# Altium PCB SM1_System..PcbDoc
Units mm, origin at the board's own origin, x right, y up, seen from the top; angles counter-clockwise.
Board outline 45.34 x 33.02 mm, 4 copper layers (Top Layer, Layer 1 (GND), Layer 2 (PWR), Bottom Layer), stack 1.716 mm thick; 56 components, 41 nets, 252 pads, 60 vias.
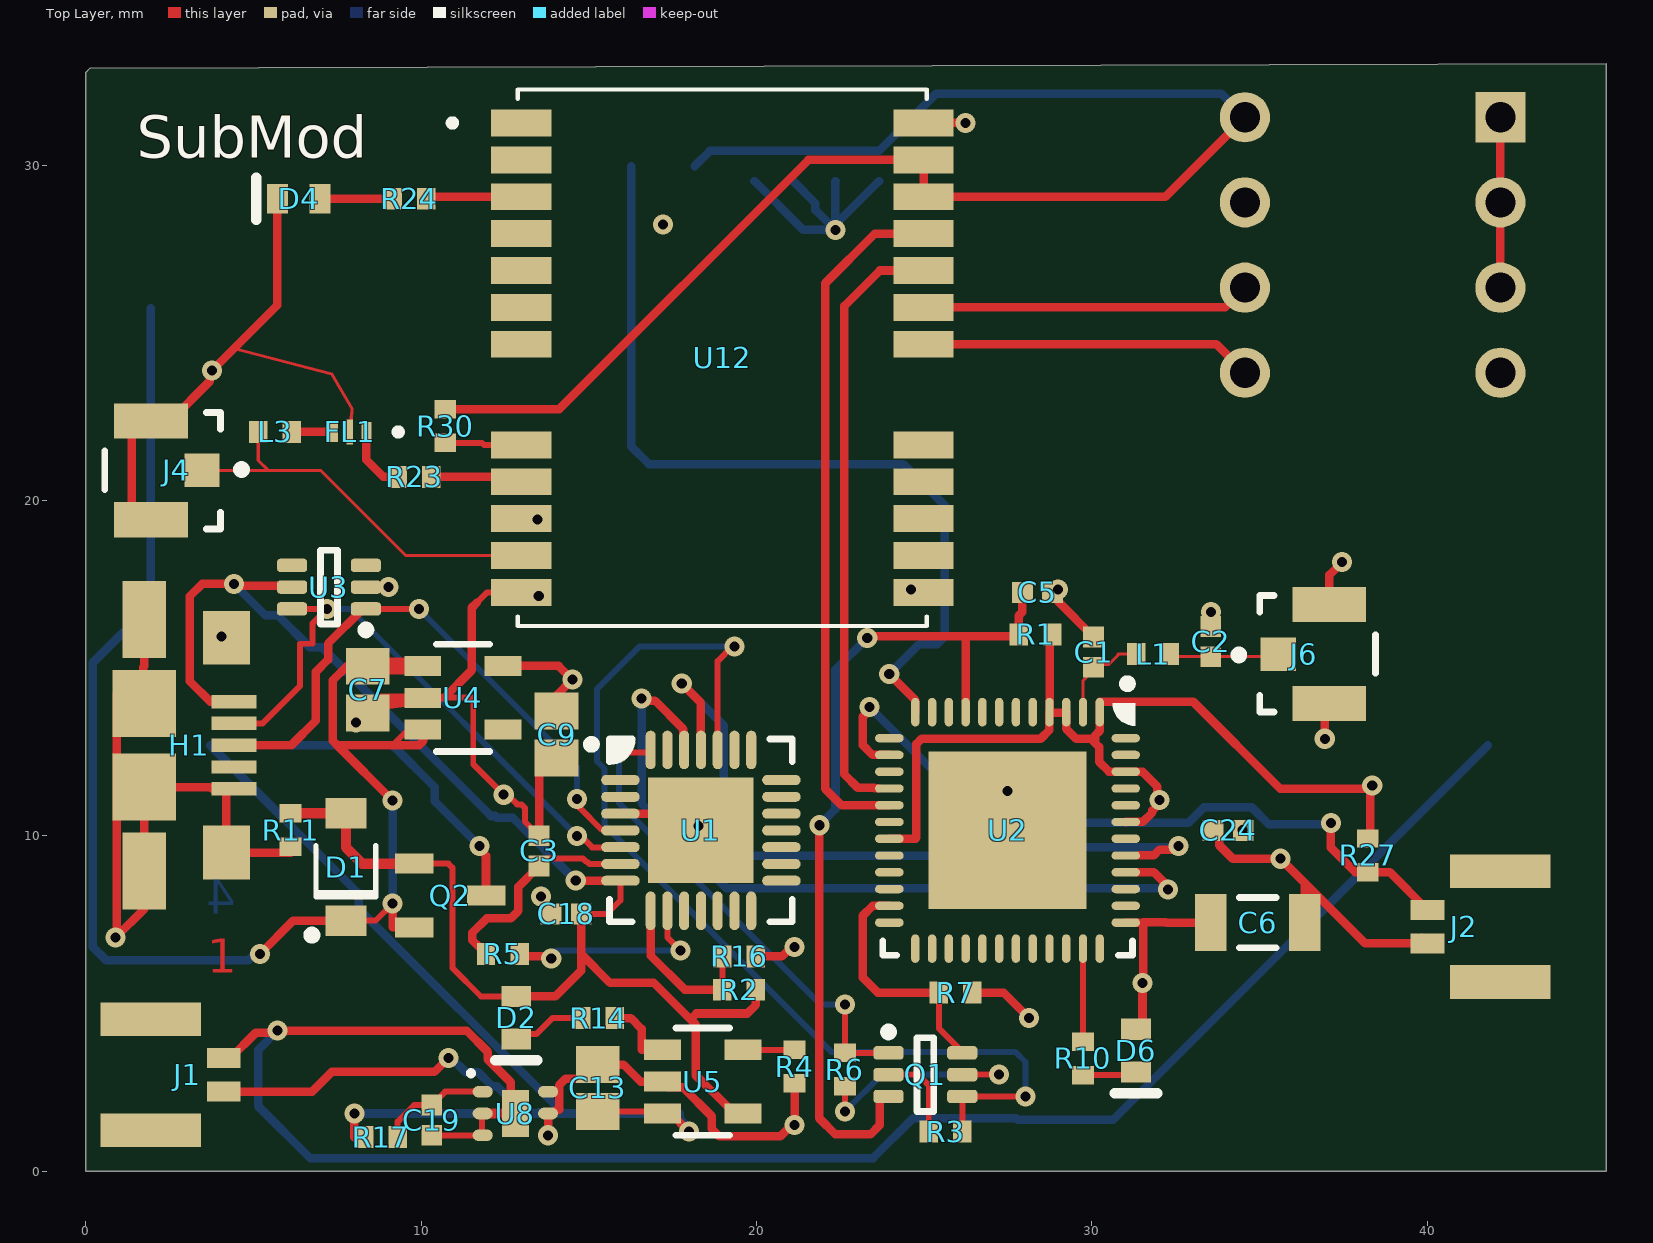
[diagram p0: Top Layer view]
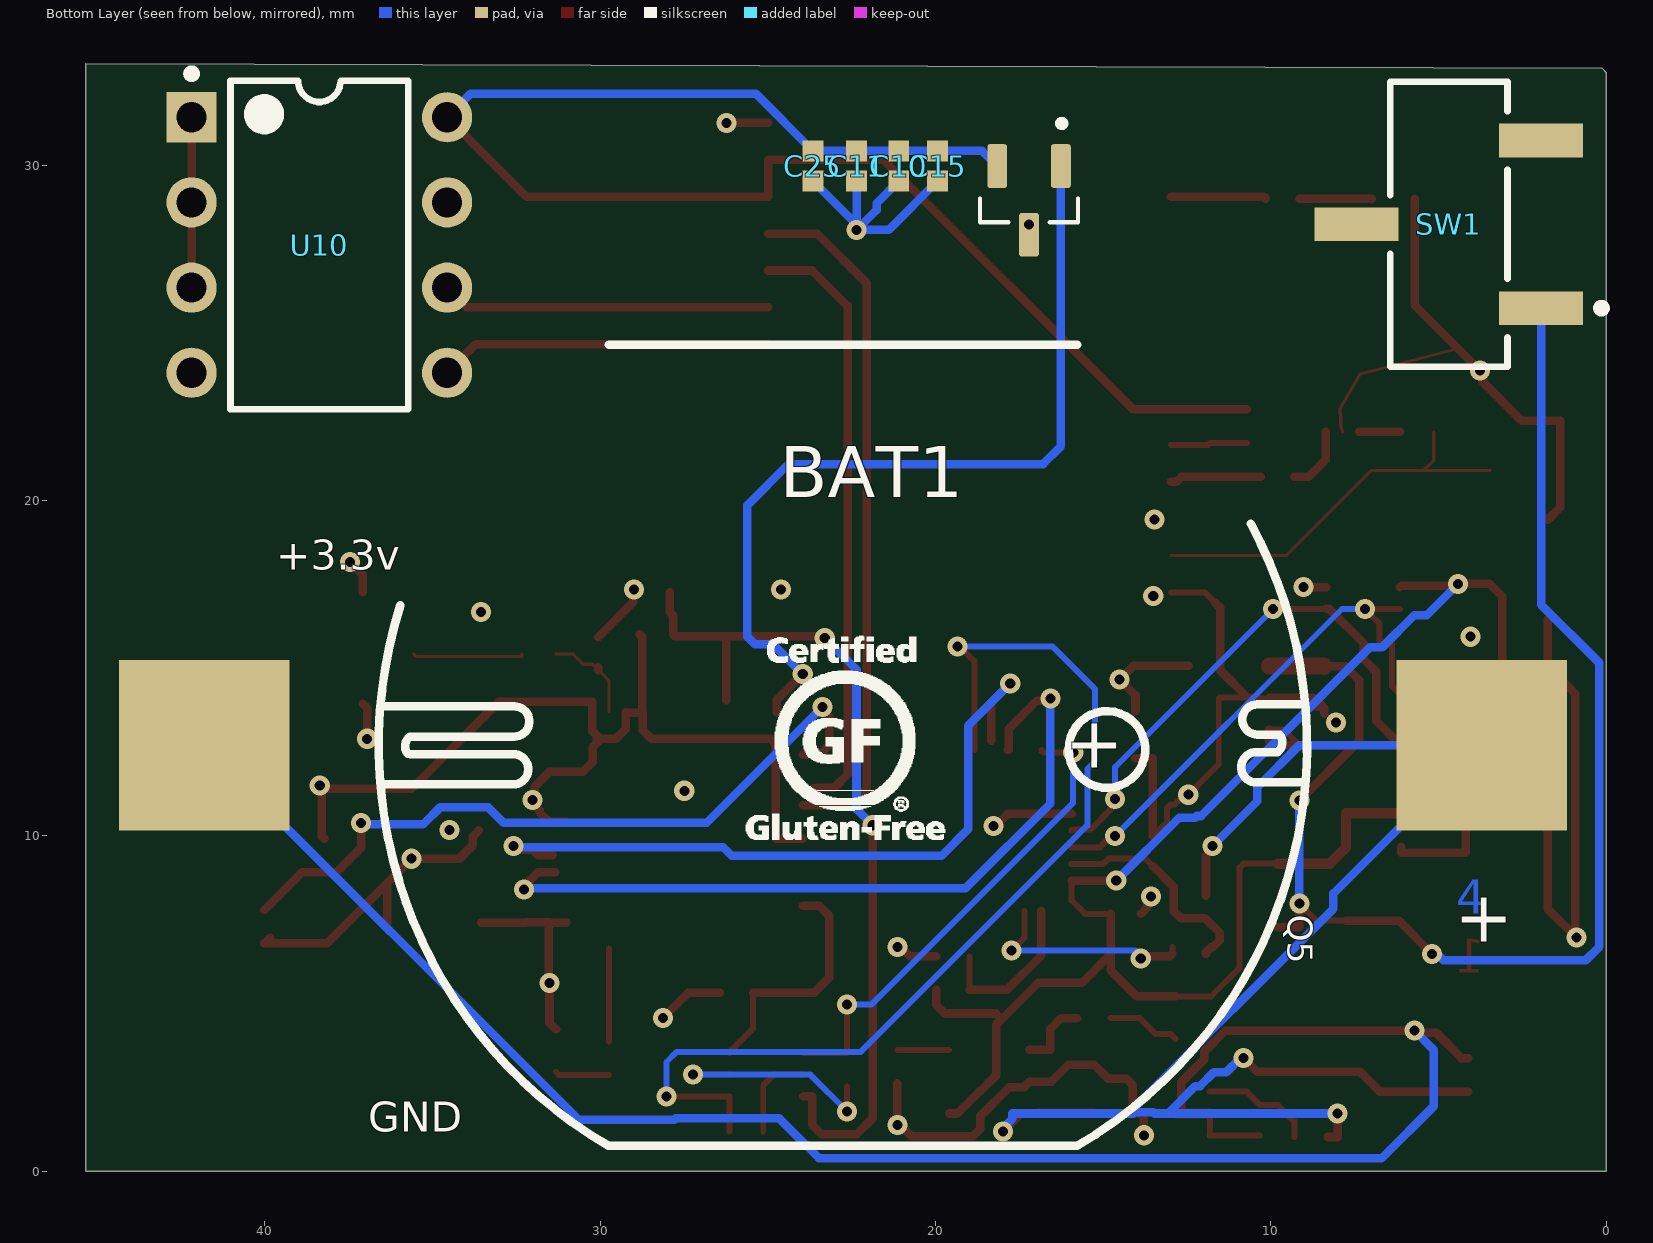
[diagram p1: Bottom Layer view, seen from below]
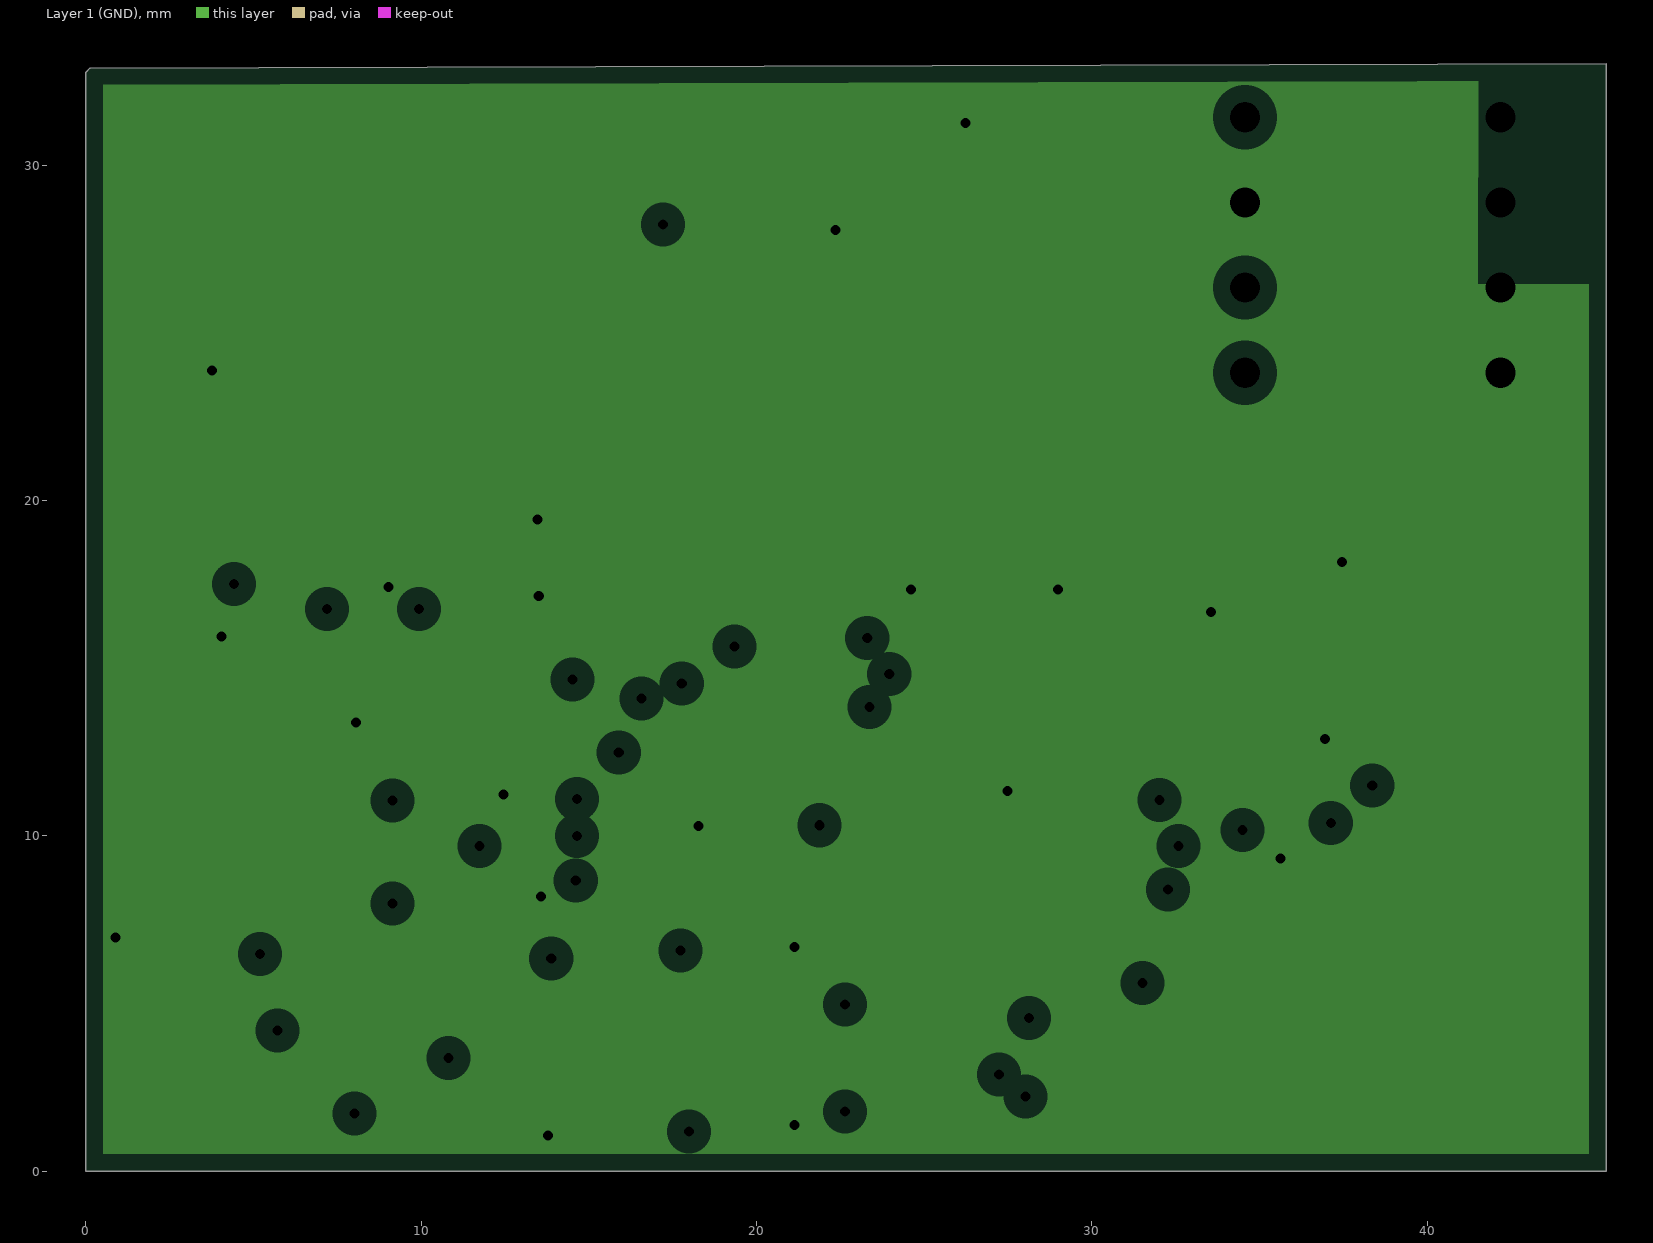
[diagram p2: Layer 1 (GND), clearances drawn from the general rule]
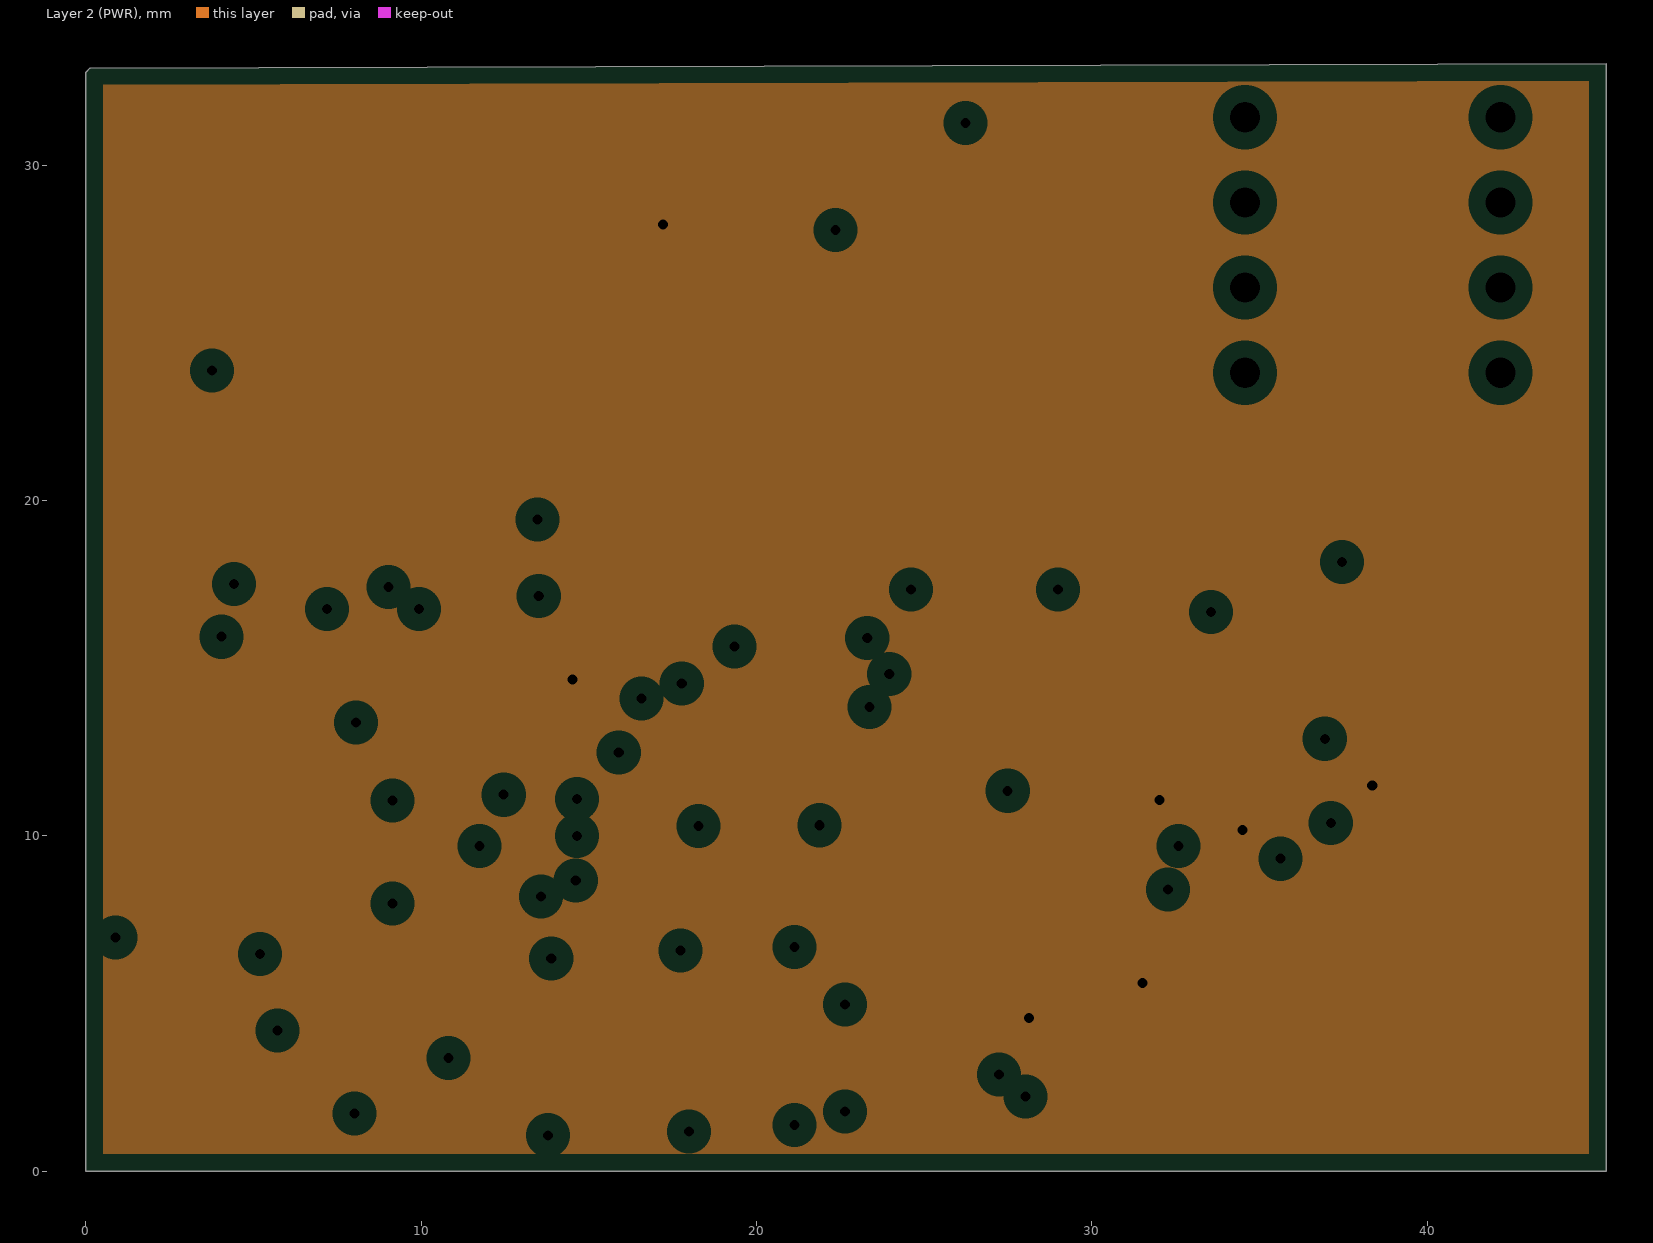
[diagram p3: Layer 2 (PWR), clearances drawn from the general rule]
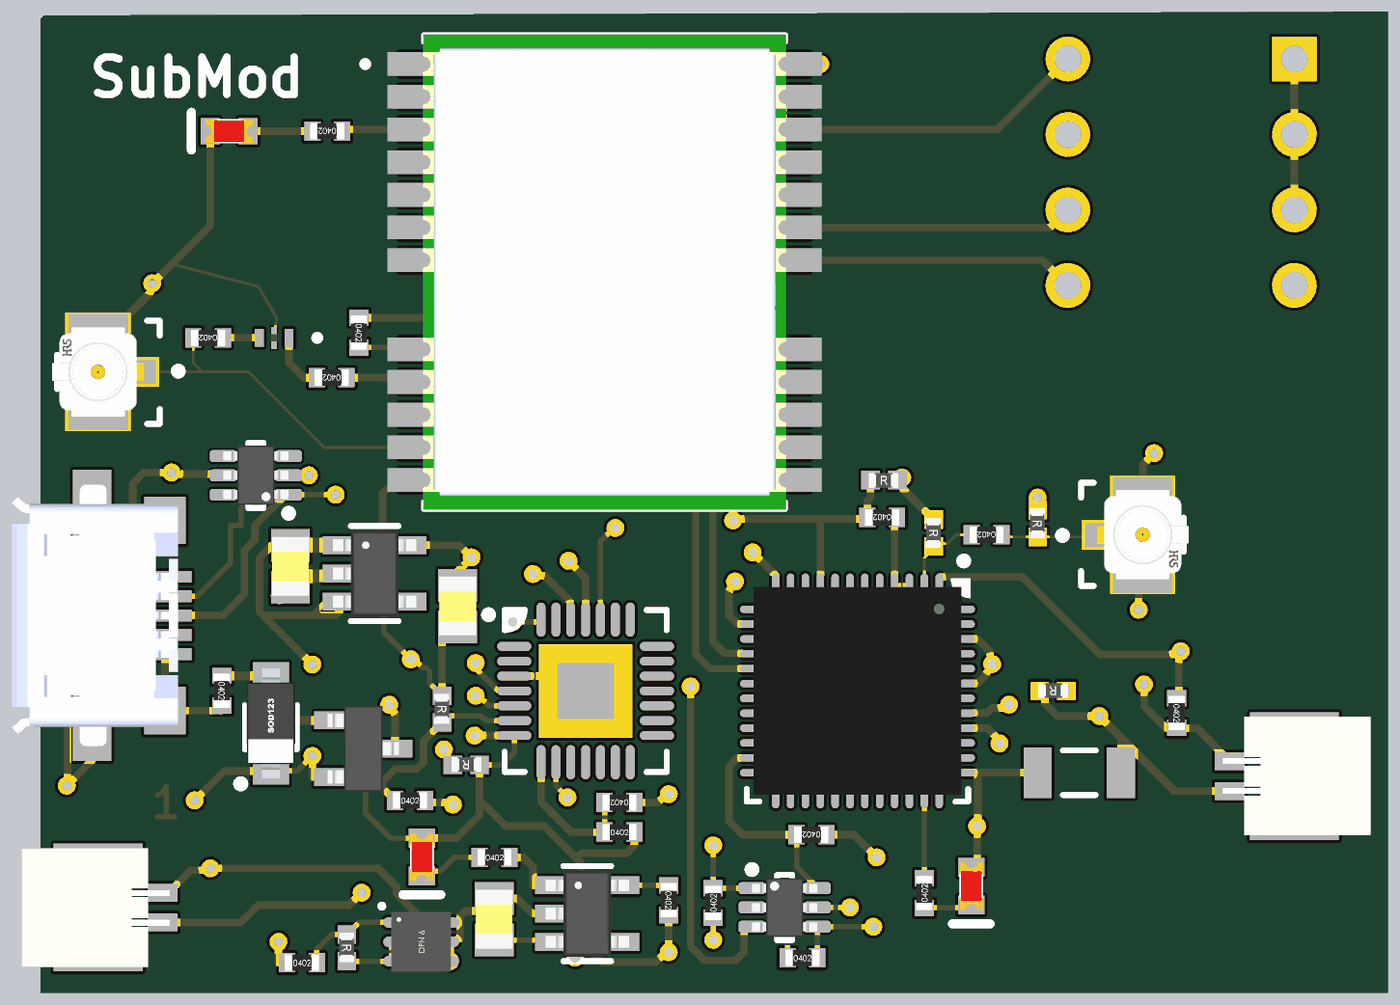
[diagram p4: 3D render of the assembled board from above, using the file's embedded part models]
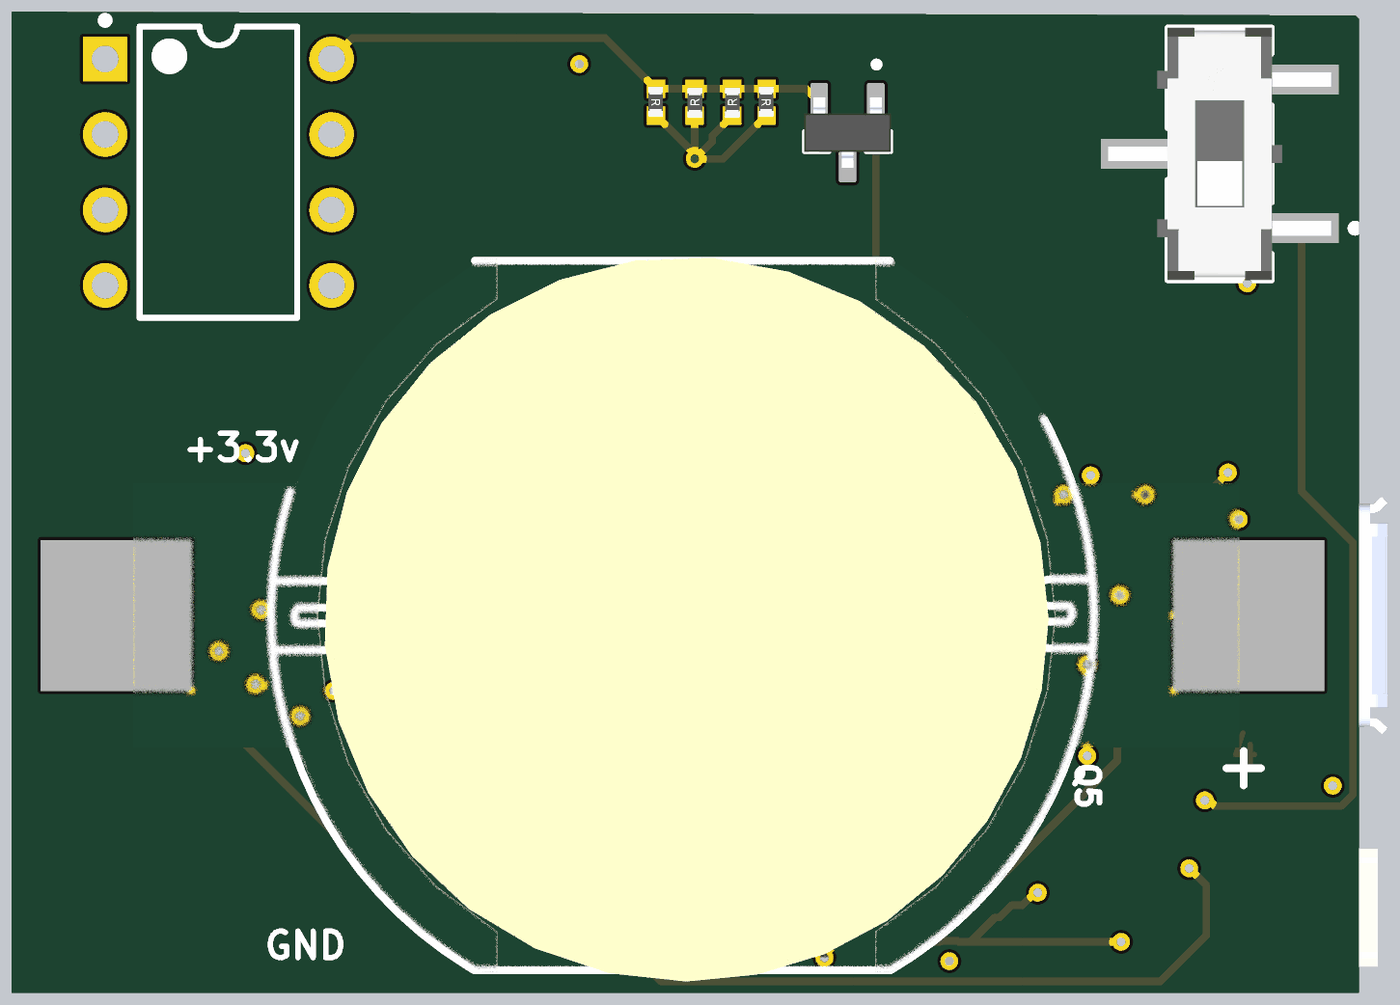
[diagram p5: 3D render of the assembled board from below, using the file's embedded part models]

## Layer stack, top to bottom
Top Solder: solder mask 0.0102, Solder Resist, Dk 3.5
Top Layer: signal copper 0.0356
Dielectric 2: prepreg 0.0711, PP-006, Dk 4.1
Layer 1 (GND): plane copper 0.035, net GND
Dielectric 1: dielectric 1.4326, FR-4, Dk 4.8
Layer 2 (PWR): plane copper 0.035, net +3.3V
Dielectric 3: prepreg 0.0711, PP-006, Dk 4.1
Bottom Layer: signal copper 0.0356
Bottom Solder: solder mask 0.0102, Solder Resist, Dk 3.5

## Board outline
0.127,32.893 0,32.766 0,0 45.339,0 45.339,33.02

## Design rules (kind name [scope] priority, off if disabled: settings)
Clearance Clearance_H1 [All vs InComponent('H1')] p1: gap=0.241 ignorepadtopadclearanceinfootprint=FALSE
Clearance Clearance_U3 [All vs InComponent('U3')] p2: gap=0.241 ignorepadtopadclearanceinfootprint=FALSE
Clearance Clearance_Q1 [All vs InComponent('Q1')] p3: gap=0.241 ignorepadtopadclearanceinfootprint=FALSE
Clearance Clearance_X1 [All vs InComponent('X1')] p4: gap=0.216 ignorepadtopadclearanceinfootprint=FALSE
Clearance Clearance_U2 [All vs InComponent('U2')] p5: gap=0.241 ignorepadtopadclearanceinfootprint=FALSE
Clearance Clearance_U1 [All vs InComponent('U1')] p6: gap=0.198 ignorepadtopadclearanceinfootprint=FALSE
Clearance Clearance_U6 [All vs InComponent('U6')] p7: gap=0.191 ignorepadtopadclearanceinfootprint=FALSE
Clearance [All] p8: gap=0.254 ignorepadtopadclearanceinfootprint=FALSE except(0: Arc-Hole Track-Hole SMDPad-Hole THPad-Hole Via-Hole Fill-Hole Poly-Hole Region-Hole Text-Hole)
MaxMinImpedance [InNet('NetC1_2')] p1: minimum=50.00 maximum=50.00
MinimumSolderMaskSliver MinimumSolderMaskSliver_X1 [All vs InComponent('X1')] p1: minsoldermaskwidth=0.015
MinimumSolderMaskSliver [All] p2: minsoldermaskwidth=0.025
PlaneClearance [All] p1: clearance=0.508
PlaneConnect [All] p1: pad.planeconnectstyle=Relief pad.reliefexpansion=0.508 pad.reliefentries=4 pad.reliefconductorwidth=0.254 pad.reliefairgap=0.254 via.planeconnectstyle=Direct via.reliefexpansion=0.508 via.reliefentries=4 via.reliefconductorwidth=0.254 via.reliefairgap=0.254
PolygonConnect [All] p1: connectstyle=Relief reliefconductorwidth=0.254 reliefentries=4 polygonreliefangle="90 Angle" airgapwidth=0.254
RoutingVias [All] p1: holewidth=0.3 width=0.6 viastyle="Through Hole" minholewidth=0.3 minwidth=0.6 maxholewidth=0.3 maxwidth=0.6
SilkToSilkClearance [All] p1: silktosilkclearance=0.127
SilkToSolderMaskClearance [IsPad] p1: minsilkscreentomaskgap=0.127 clearancetoexposedcopper=TRUE
SolderMaskExpansion [All] p1: expansion=0.102 istentingtop=FALSE
Width [InNet('NetJ4_1')] p1: maxlimit=1.016 minlimit=0.093 preferedwidth=0.093
25 further rules are at their usual default settings.

## Classes and differential pairs
component class SM2_GPS_Module: C10 C11 C15 C25 D4 FL1 J4 L3 R23 R24 R30 U10 U12
component class SM1_System: BAT1 C1 C2 C3 C5 C6 C7 C9 C13 C18 C19 C24 D1 D2 D6 H1 J1 J2 J6 L1 Q1 Q2 Q5 R1 R2 R3 R4 R5 R6 R7 R10 R11 R14 R16 R17 R27 SW1 U1 U2 U3 U4 U5 U8

## Components (designator, comment, footprint, x,y, rotation, side; value= is the part's Value field where it differs from the comment)
BAT1 "BATTERY-HOLDER (2450)" BU2450SM-JJ-GTR 22.763,12.7 r0 bottom locked value="Coin Cell Holder"
C1 "" CAPC1005X56N#1 30.054,15.476 r270 top
C2 "" CAPC1005X56N#1 33.549,15.791 r270 top
C3 "4.7uF" CAPC1005X56N#2 13.517,9.547 r270 top
C5 "0.1uF" CAPC1005X56N#2 28.379,17.257 r0 top
C6 "100uF" CAPC3216X160L 34.949,7.41 r0 top
C7 "10uF" CAPC2012X140N 8.412,14.355 r270 top
C9 "10uF" CAPC2012X140N 14.036,13.016 r270 top
C10 "10uF" CAPC1005X56N#1 21.097,29.972 r90 bottom
C11 "0.1uF" CAPC1005X56N#1 22.356,29.972 r90 bottom
C13 "10uF" CAPC2012X140N 15.27,2.478 r90 top
C15 "100nF" CAPC1005X56N#1 19.939,29.972 r270 bottom
C18 "1uF" CAPC1005X56N#2 14.323,7.671 r180 top
C19 "0.1uF" CAPC1005X56N#2 10.317,1.517 r270 top
C24 "0.1uF" CAPC1005X56N#1 34.066,10.16 r180 top
C25 "0.1uF" CAPC1005X56N#1 23.654,29.972 r270 bottom
D1 "MBR0520-TP" SOD123 7.756,9.068 r90 top value=MBR0520
D2 "LED_0603" LED1608X55N-RED 12.836,4.572 r90 top value=Red
D4 "LED_0603" LED1608X55N-RED 6.35,28.999 r0 top value=Red
D6 "LED_0603" LED1608X55N-RED 31.316,3.591 r90 top value=Red
FL1 "YFF15SC1H470MT000N" FIL_YFF15SC1H470MT000N 7.866,22.042 r180 top
H1 "Micro USB" 1981584-1 3.078,12.7 r270 top locked
J1 "CON2" JST_Micro_2PIN 4.116,2.871 r270 top
J2 "CON2" JST_Micro_2PIN 40.011,7.288 r90 top
J4 "U.FL-R-SMT-1(80)" FP-U_FL-R-SMT-1_80-MFG 1.941,20.897 r90 top
J6 "U.FL-R-SMT-1(80)" FP-U_FL-R-SMT-1_80-MFG 37.084,15.418 r270 top
L1 "Inductor" RESC1005X40L 31.83,15.418 r180 top value=1.8nH
L3 "Inductor" RESC1005X40L 5.643,22.042 r180 top value=27nH
Q1 "BC847S" SOT65P210X110-6N 25.038,2.85 r0 top value=2NPN
Q2 "FDN340P" SOT95P240X110-3N 10.863,8.217 r0 top locked value="Mosfet P-H"
Q5 "IRLML2502" SOT95P237X112-3N 17.211,28.947 r270 bottom
R1 "10K" RESC1005X40L 28.321,16.002 r180 top
R2 "22.1K" RESC1005X40L 19.481,5.41 r0 top
R3 "10K" RESC1005X40L 25.638,1.178 r0 top
R4 "43K" RESC1005X40L 21.137,3.117 r270 top
R5 "4.7K" RESC1005X40L 12.434,6.477 r0 top
R6 "10K" RESC1005X40L 22.636,3.025 r90 top
R7 "10K" RESC1005X40L 25.937,5.324 r180 top
R10 "1K" RESC1005X40L 29.737,3.36 r90 top
R11 "100K" RESC1005X40L 6.105,10.168 r270 top
R14 "2K" RESC1005X40L 15.278,4.561 r0 top
R16 "47.5K" RESC1005X40L 19.481,6.401 r180 top
R17 "100R" RESC1005X40L 8.801,1.016 r0 top
R23 "22R" RESC1005X40L 9.801,20.701 r180 top value=10
R24 "1K" RESC1005X40L 9.652,28.999 r180 top
R27 "DNP" RESC1005X40L 38.227,9.418 r270 top
R30 "1K" RESC1005X40L 10.717,22.217 r270 top
SW1 "JS102011SCQN" FP-JS102011SCQN-MFG 4.691,28.234 r90 bottom
U1 "CP2102N" 28-QFN 18.343,10.16 r0 top locked
U2 "ESP32-PICO-D4" QFN48 27.487,10.16 r270 top
U3 "PESD5V0L5UY" SOT65P210X110-6N 7.251,17.439 r180 top value=ESD
U4 "HT7833" SOT95P280X144-5N 11.246,14.113 r0 top value="LDO 3.3V"
U5 "SL4054ST25P" SOT95P280X144-5N 18.397,2.667 r0 top
U8 "XB6566H0" "DFN-6 2x2mm" 12.811,1.717 r0 top value="Battery Protection"
U10 "24AA32A-I/P" PDIP300-P8 38.376,27.617 r180 bottom
U12 "NEO-7M-0" XCVR_NEO-7M-0 18.981,24.257 r0 top

## Footprints (in the part's own frame and the unit in brackets; to place one, negate y for a bottom-side part, rotate by r counter-clockwise, add the part's x,y. Pads: shape width x height; smd on the part's side, far side on the other; paste and mask are expansions set on the pad)
28-QFN [mm] "QFN, 28-Leads, Body 5.00x5.00mm, Pitch 0.50mm, Thermal Pad 3.15x3.15mm, IPC Medium Density"
  oval 1.15x0.3 smd: 1(-2.4,1.5) 2(-2.4,1) 3(-2.4,0.5) 4(-2.4,0) 5(-2.4,-0.5) 6(-2.4,-1) 7(-2.4,-1.5) 15(2.4,-1.5) 16(2.4,-1) 17(2.4,-0.5) 18(2.4,0) 19(2.4,0.5) 20(2.4,1) 21(2.4,1.5)
  oval 0.3x1.15 smd: 8(-1.5,-2.4) 9(-1,-2.4) 10(-0.5,-2.4) 11(0,-2.4) 12(0.5,-2.4) 13(1,-2.4) 14(1.5,-2.4) 22(1.5,2.4) 23(1,2.4) 24(0.5,2.4) 25(0,2.4) 26(-0.5,2.4) 27(-1,2.4) 28(-1.5,2.4)
  rect 3.15x3.15 smd paste-0.635: 29(0,0)
  silkscreen extent -3.39,-2.73 2.73,2.73, body extent -2.58,-2.57 2.57,2.58, height 1
1981584-1 [mm] "CONN RCPT MICRO USB TYPE AB"
  rect 0.4x1.35 smd: 1(-1.3,1.338) 2(-0.65,1.338) 3(0,1.338) 4(0.65,1.338) 5(1.3,1.338)
  rect 2.3x1.3 smd: 6(-3.75,-1.338) 6(3.75,-1.338)
  rect 1.6x1.4 smd: 6(-3.2,1.113) 6(3.2,1.113)
  rect 2x1.9 smd: 6(-1.25,-1.338) 6(1.25,-1.338)
  body extent -4.4,-4.05 4.4,1.55, height 2.75
BU2450SM-JJ-GTR [mm] "HOLDER,BATT,COIN,24.5MM,SMT"
  rect 5.08x5.08 smd: 1(-19.05,0) 2(19.05,0)
  silkscreen extent -13.84,-11.94 13.84,11.95, body extent -21.38,-12.06 21.12,12.32, height 7.38
CAPC1005X56N#1 [mm] "Chip Capacitor, 2-Leads, Body 1.0x0.5mm, IPC Medium Density (0402 ceramic)"
  rect 0.62x0.62 smd paste-0.305: 1(-0.45,0) 2(0.45,0)
  body extent -0.55,-0.3 0.55,0.3, height 0.6
CAPC1005X56N#2 [mm] "Chip Capacitor, 2-Leads, Body 1.0x0.5mm, IPC Medium Density (0402 ceramic)"
  rect 0.62x0.62 smd: 1(-0.45,0) 2(0.45,0)
  body extent -0.55,-0.3 0.55,0.3, height 0.6
CAPC2012X140N [mm] "Chip Capacitor, 2-Leads, Body 2.0x1.3mm, IPC Medium Density (0805 ceramic)"
  rect 1.1x1.3 smd: 1(-0.7,0) 2(0.7,0)
  body extent -1,-0.62 1,0.63, height 1.24
CAPC3216X160L [mm] "Chip Capacitor, 2-Leads, Body 3.2x1.6mm, IPC Least Density(C1206)"
  rect 0.95x1.7 smd: 1(-1.4,0) 2(1.4,0)
  silkscreen extent -0.55,-0.75 0.55,0.75, body extent -1.7,-0.9 1.7,0.9, height 1.9
"DFN-6 2x2mm" [mm] "DFN, 6-Leads, Body 2.00x2.00mm, Pitch 0.65mm, IPC High Density"
  oval 0.6x0.35 smd: 1(-0.975,0.65) 2(-0.975,0) 3(-0.975,-0.65) 4(0.975,-0.65) 5(0.975,0) 6(0.975,0.65)
  rect 0.8x1.4 smd paste-0.15: 7(0,0)
  silkscreen extent -1.37,1.15 -1.27,1.25, body extent -1,-1 1,1, height 0.75
FIL_YFF15SC1H470MT000N [mm]
  rect 0.3x0.6 smd: 1(-0.5,0) 2(0.5,0)
  rect 0.19x0.75 smd paste-1 mask+0: 3(0,0)
  silkscreen extent -1.55,-0.1 -1.35,0.1
FP-JS102011SCQN-MFG [mm]
  rect 1x2.5 smd paste+0 mask+0: 1(-2.5,-2.75) 2(0,2.75) 3(2.5,-2.75)
  silkscreen extent -4.25,-4.67 4.25,1.75, body extent -4.25,-3.75 4.25,3.75, height 5.5
FP-U_FL-R-SMT-1_80-MFG [mm]
  rect 1x1.05 smd paste-1000 mask+0: 1(0,-1.525)
  rect 1.05x2.2 smd paste-1000 mask+0: 2(-1.475,0) 3(1.475,0)
  silkscreen extent -1.75,-2.83 1.72,1.38, body extent -2.1,-2.15 2.1,1.73, height 0.25
JST_Micro_2PIN [mm]
  rect 0.6x1 smd: 1(0.5,0) 2(-0.5,0)
  rect 1x3 smd: ""(-1.65,-2.175) ""(1.65,-2.175)
  body extent -1.99,-4.74 2,0.24, height 2.9
LED1608X55N-RED [mil] "Chip LED RED, 2-Leads, Body 1.6x0.8mm, IPC Medium Density (0603 med)"
  rect 25x35 smd: 1(-25,0) 2(25,0)
  silkscreen extent -50,-25 -50,25, body extent -31,-16 31,16, height 24
PDIP300-P8 [mm] "8-Pin Plastic Dual In-Line Package (PDIP)"
  rect 1.5x1.5 hole 0.9: 1(-3.81,3.81)
  round 1.5 hole 0.9: 2(-3.81,1.27) 3(-3.81,-1.27) 4(-3.81,-3.81) 5(3.81,-3.81) 6(3.81,-1.27) 7(3.81,1.27) 8(3.81,3.81)
  silkscreen extent -3.94,-4.9 2.65,5.23, body extent -3.55,-4.9 3.55,4.9, height 4.32
QFN48 [mm] "QFN, 48-Leads, Body 7x7mm, Pitch 0.5mm, IPC Medium Density"
  oval 0.85x0.25 smd: 1(-3.525,2.75) 2(-3.525,2.25) 3(-3.525,1.75) 4(-3.525,1.25) 5(-3.525,0.75) 6(-3.525,0.25) 7(-3.525,-0.25) 8(-3.525,-0.75) 9(-3.525,-1.25) 10(-3.525,-1.75) 11(-3.525,-2.25) 12(-3.525,-2.75) 25(3.525,-2.75) 26(3.525,-2.25) 27(3.525,-1.75) 28(3.525,-1.25) 29(3.525,-0.75) 30(3.525,-0.25) 31(3.525,0.25) 32(3.525,0.75) 33(3.525,1.25) 34(3.525,1.75) 35(3.525,2.25) 36(3.525,2.75)
  oval 0.25x0.85 smd: 13(-2.75,-3.525) 14(-2.25,-3.525) 15(-1.75,-3.525) 16(-1.25,-3.525) 17(-0.75,-3.525) 18(-0.25,-3.525) 19(0.25,-3.525) 20(0.75,-3.525) 21(1.25,-3.525) 22(1.75,-3.525) 23(2.25,-3.525) 24(2.75,-3.525) 37(2.75,3.525) 38(2.25,3.525) 39(1.75,3.525) 40(1.25,3.525) 41(0.75,3.525) 42(0.25,3.525) 43(-0.25,3.525) 44(-0.75,3.525) 45(-1.25,3.525) 46(-1.75,3.525) 47(-2.25,3.525) 48(-2.75,3.525)
  rect 4.7x4.7 smd paste-0.5: 49(0,0)
  silkscreen extent -4.5,-3.73 3.73,3.81, body extent -3.52,-3.51 3.5,3.51, height 0.78
RESC1005X40L [mm] "Chip Resistor, 2-Leads, Body 1.0x0.5mm, IPC Medium Density (0402)"
  rect 0.55x0.65 smd: 1(-0.5,0) 2(0.5,0)
  body extent -0.57,-0.27 0.58,0.28, height 0.41
SOD123 [mil] "Molded Diode, 2-Leads, Body 2.85x1.8mm, IPC Medium Density (SOD123)"
  rect 36x48 smd: 1(-63,0) 2(63,0)
  silkscreen extent -85,-35 25,45, body extent -73,-31 73,31, height 50
SOT65P210X110-6N [mm] "SC70, 6-Leads, Body 2.4x2.2mm (max), Pitch 0.65mm, IPC Medium Density"
  rrect50% 0.9x0.4 smd mask+0.076: 1(-1.1,0.675) 2(-1.1,0.025) 3(-1.1,-0.625) 4(1.1,-0.625) 5(1.1,0.025) 6(1.1,0.675)
  silkscreen extent -1.22,-1.08 0.25,1.42, body extent -1.1,-0.97 1.1,1.01, height 0.99
SOT95P237X112-3N [mm]
  rrect25% 1.3x0.59 smd: 1(-1.025,0.95) 2(-1.025,-0.95) 3(1.025,0)
  silkscreen extent -2.39,-1.46 0.65,1.46, body extent -1.18,-1.46 1.18,1.46, height 1.12
SOT95P240X110-3N [mm] "SOT23, 3-Leads, Body 3.0x2.5mm (max), Pitch 0.95mm, IPC Medium Density"
  rect 1.15x0.6 smd: 1(-1.075,0.95) 2(-1.075,-0.95) 3(1.075,0)
  body extent -1.2,-1.45 1.2,1.45, height 0.99
SOT95P280X144-5N [mm] "SOT23, 5-Leads, Body 3.1x3.0mm (max), Pitch 0.95mm, IPC Medium Density (RFMD SOT23-5)"
  rect 1.1x0.6 smd: 1(-1.2,0.95) 2(-1.2,0) 3(-1.2,-0.95) 4(1.2,-0.95) 5(1.2,0.95)
  silkscreen extent -0.8,-1.6 0.8,1.6, body extent -1.4,-1.45 1.4,1.45, height 1.45
XCVR_NEO-7M-0 [mm]
  rect 1.8x0.8 smd paste-2: 1(-6,7) 2(-6,5.9) 3(-6,4.8) 4(-6,3.7) 5(-6,2.6) 6(-6,1.5) 7(-6,0.4) 8(-6,-2.6) 9(-6,-3.7) 10(-6,-4.8) 11(-6,-5.9) 12(-6,-7) 13(6,-7) 14(6,-5.9) 15(6,-4.8) 16(6,-3.7) 17(6,-2.6) 18(6,0.4) 19(6,1.5) 20(6,2.6) 21(6,3.7) 22(6,4.8) 23(6,5.9) 24(6,7)
  silkscreen extent -8.15,-8 6.1,8, body extent -6.1,-8 6.1,8, height 2.6

## Part data
BAT1: library part BU2450SM-JJ-GTR, "HOLDER,BATT,COIN,24.5MM,SMT", Manufacturer=MPD, PartNumber=BU2450SM-JJ-GTR, Vendor=LCSC
C1 C2: library part CAP_0402, "DNP"
C3: library part CAP_0603, "CAP CER 4.7uF 16V 0402", Manufacturer=Kyocera, PartNumber=CM05X5R475M16AH, Vendor=LCSC
C5 C10 C11 C15 C19 C24 C25: library part CAP_0402, "CAP CER 0.1uF 16V 0402", Manufacturer=CCTC, PartNumber=TCC0402X5R104M160AT, Vendor=LCSC
C6: library part CAP_1206, "CAP CER 100uF 6.3V 1206", Manufacturer="Taiyo Yuden", PartNumber=JMK316BJ107ML-T, Vendor=LCSC
C7 C9: library part CAP_0805, "CAP 10uF 0805", Manufacturer=Murata, PartNumber=GRM21BB31C106KE15L, Vendor=LCSC
C13: library part CAP_0805, "CAP CER 10uF 16V 0805", Manufacturer=Samsung, PartNumber=CL21A106KOQNNNG, Vendor=LCSC
C18: library part CAP_0603, "CAP CER 1uF 16V 0402", Manufacturer=Murata, PartNumber=GRM155R61C105KA12D, Vendor=LCSC
D1: "DIODE SCHOTTKY 20V 500MA SOD123", Manufacturer=CJ, PartNumber=MBR0520, Vendor=LCSC
D2 D4 D6: "LED RED CLEAR 0603 SMD", Manufacturer=FNO, PartNumber=FC-DA1608HRK-620D, Vendor=LCSC
FL1: Package=None, Availability=Unavailable, MP=YFF15SC1H470MT000N, Price=None
H1: library part 1981584-1, "CONN RCPT MICRO USB TYPE AB", Manufacturer="REG CON", PartNumber=C21377, Vendor=LCSC
J1 J2: library part JST_Micro_CONN_2PIN, "JST MIcro CONN 2POS"
J4 J6: library part CMP-11598-000004-1, "CONN U.FL RCPT STR 50 OHM SMD", Case/Package=SMD/SMT, Dielectric Material=Polymer, Housing Color=Beige, Max Frequency=6GHz, Max Operating Temperature=90°C, Min Operating Temperature=-40°C, Package Quantity=10000, Body Material=Bronze, Body Plating=Silver, Center Contact Plating=Gold, Connector Type=Receptacle, Contact Material=Brass, Fastening Type=SNAP-ON, Impedance=50R, Lead Free="Lead Free", Mating Cycles=30, Mount="Surface Mount", Number of Ports=1, Packaging="Tape and Reel", RoHS Compliant=Yes, Series=U.FL, Termination=Solder
L1 L3: "Inductor 1.8nH 0402", Manufacturer=GFBE, PartNumber=BKW0603UC1N8KGT, Vendor=LCSC
Q1: "TRANS 2NPN 44V 0.1A SC-70-6", Manufacturer=Changjiang, PartNumber=BC847S, Vendor=LCSC
Q2: "MOSFET P-CH 20V 2A SOT-23", Manufacturer="On Semi", PartNumber=FDN340P, Vendor=LCSC
Q5: "N-Channel 20 V 4.2A (Ta) 1.25W (Ta) Surface Mount Micro3Ã¢â€žÂ¢ /SOT-23", Package="SOT-23-3 International Rectifier", Availability="Not in stock", Check_prices=https://www.snapeda.com/parts/IRLML2502/Infineon+Technologies/view-part/?ref=eda, MF="Infineon Technologies", MP=IRLML2502, Price=None, SnapEDA_Link=https://www.snapeda.com/parts/IRLML2502/Infineon+Technologies/view-part/?ref=snap
R1 R3 R6 R7 R27: library part RES_0402, "RES SMD 10K OHM 0402", Manufacturer=Guangdong, PartNumber=RC-02W1002FT, Vendor=LCSC
R2: library part RES_0603, "RES SMD 22.1K OHM 0402", Manufacturer=Yageo, PartNumber=RC0402FR-0722K1L, Vendor=LCSC
R4: library part RES_0603, "RES SMD 43K OHM 0402", Manufacturer=Uniroyal, PartNumber=0402WGF4302TCE, Vendor=LCSC
R5: library part RES_0603, "RES SMD 4.7K OHM 0402", Manufacturer=Yageo, PartNumber=RC0402FR-074K7L, Vendor=LCSC
R10: library part RES_0402, "RES SMD 1K OHM 0402", Manufacturer=Yageo, PartNumber=RC0402FR-071KL, Vendor=LCSC
R11 R23 R24 R30: library part RES_0603, "RES SMD 100K OHM 0402", Manufacturer="Uniroyal Elec", PartNumber=0402WGF1003TCE, Vendor=LCSC
R14: library part RES_0603, "RES SMD 2K OHM 1% 1/10W 0402", Manufacturer="LIZ Elec", PartNumber=CR0402FF2001G, Vendor=LCSC
R16: library part RES_0603, "RES SMD 47.5K OHM 0402", Manufacturer=Yageo, PartNumber=RC0402FR-0747K5L, Vendor=LCSC
R17: library part RES_0603, "RES SMD 100R OHM 1% 1/10W 0402", Manufacturer=Yageo, PartNumber=RC0402FR-07100RL, Vendor=LCSC
SW1: library part CMP-10038-000023-1, "SWITCH SLIDE SPDT 300MA 6V", Actuator Color=Black, Case/Package=SMD/SMT, Contact Resistance=70mR, Current Rating=300mA, Max Operating Temperature=85°C, Max Voltage Rating (DC)=30V, Min Operating Temperature=-40°C, Package Quantity=4000, Voltage Rating (DC)=6V, Actuator Length=2mm, Actuator Material=Nylon, Actuator Type=Standard, Contact Material="Copper Alloy", Contact Plating=Silver, Depth=7.5mm, Electrical Life=5000Cycles, Housing Material=Nylon, Length=8.5mm, Max Current Rating=300mA, Mount="Surface Mount", Orientation=Straight, Packaging="Tape and Reel", Radiation Hardening=No, RoHS Compliant=Yes, Series=JS, Switch Function=On-On, Switch Travel=2mm, Termination="Gull Wing", Throw Configuration=SPDT
U1: "IC BRIDGE USB TO UART 28QFN", Manufacturer="Silicon Labs", PartNumber=CP2102N-A01-GQFN28, Vendor=LCSC
U2: "RF Transceiver ICs QFN-48_7x7x05P RoHS", Manufacturer=Espressif, PartNumber=ESP32-PICO-D4, Vendor=LCSC
U3: "TVS SOT-363 RoHS", Manufacturer=Yenji, PartNumber=PESD5V0L5UY, Vendor=LCSC
U4: "IC LDO 3.3V 0.5A SOT23-5", Manufacturer=Holtek, PartNumber=HT7833, Vendor=LCSC
U5: "Charger IC Lithium-Ion/Polymer SOT23-5", Manufacturer=Techfuse, PartNumber=SL4054ST25P, Vendor=LCSC
U8: "IC Battery Protection", Manufacturer=XySemi, PartNumber=XB6566H0, Vendor=LCSC
U10: library part CMP-0159-00068-1, "32Kbit, 400kHz, 1.7V, I2C Serial EEPROM, 8-Pin PDIP, Industrial Temperature", Code_JEDEC=MS-001, DatasheetVersion="revJ, Feb-2009", PackageDescription="8-Lead Plastic Dual In-Line (P) - 300 mil Body [PDIP]", PackageReference=PDIP300-P8, PackageVersion="revBB, Aug-2009"
U12: "series RF Receiver GLONASS, GNSS, GPS 1.575GHz -161dBm - - -", Package="SMD-24 U-Blox America Inc.", Check_prices=https://www.snapeda.com/parts/NEO-7M-0/U-Blox+America+Inc./view-part/?ref=eda, MF="U-Blox America", MP=NEO-7M-0, SnapEDA_Link=https://www.snapeda.com/parts/NEO-7M-0/U-Blox+America+Inc./view-part/?ref=snap

## Via types
v1: diameter 0.6, hole 0.3, Top Layer to Bottom Layer, 60 vias

## Nets (pads, with @x,y where several pads share a name; then routed paths per layer and width w, separated by ;. In a path a pad name is that pad's centre, name@x,y a point inside that pad or via, vN(x,y) a via of type N, cw(c..) or ccw(c..) an arc to the next point about the centre after c; other vN are vias at no path point)
+3.3V: C6.1 C9.1 C24.1 D6.2 Q5.3 R1.1 R7.1 R27.1 U2.1 U2.3 U2.4 U2.19 U2.37 U2.43 U2.46 U4.5 | length 40.5
  Top Layer w0.254: U4.5 14.1,15.063 v1(14.508,14.656) 14.036,14.184 C9.1 ; U2.19 24.744,9.91 24.769,9.935 24.769,12.739 24.922,12.892 28.478,12.892 28.737,13.151 U2.4@28.737,13.665 ; R7.1 27.368,5.323 v1(28.131,4.56) ; R1.1 28.739,15.92 28.739,13.687 U2.4 U2.4@28.737,13.665 ; U2.37 31.014,7.412 31.532,7.412 31.537,7.417 32.208,7.417 32.215,7.41 C6.1 ; U2.43 31.014,10.412 31.521,10.412 31.805,10.696 31.805,10.756 32.019,10.97 v1(32.019,11.064) ; D6.2 31.321,4.226 31.512,4.417 v1(31.512,5.613) 31.537,5.638 31.537,7.41 ; v1@31.953,10.976 31.953,11.467 31.512,11.908 31.014,11.908 U2.46 31.01,11.912 30.512,11.912 30.219,12.206 30.219,12.649 30.098,12.77 ; R27.1 38.297,9.988 38.297,11.431 v1(38.363,11.497) ; v1@38.297,11.395 35.625,11.395 33.024,13.995 30.237,13.995 U2.1 30.235,13.683 30.235,13.131 30.098,12.993 30.098,12.892 30.098,12.77 ; U2.4@28.737,13.665 29.237,13.665 U2.3 29.239,13.683 29.239,13.185 29.533,12.892 29.976,12.892 30.098,12.77
  other v1: 34.49,10.168 17.211,28.234
D+: H1.3 U1.4 U3.1 | length 17.7
  Top Layer w0.178: U3.1 v1(9.933,16.764) ; v1(14.645,11.1) 14.726,11.019 14.726,10.834 15.377,10.183 15.92,10.183 U1.4
  Top Layer w0.254: H1.3 6.126,12.7 6.862,13.437 6.862,14.892 7.226,15.256 7.226,15.731 8.259,16.764 U3.1
  Bottom Layer w0.178: v1(9.933,16.764) 14.645,12.052 v1(14.645,11.1)
D-: H1.2 U1.5 U3.6 | length 18
  Top Layer w0.178: H1.2 5.273,13.35 6.392,14.469 6.392,15.726 6.757,15.726 6.757,16.326 v1(7.194,16.764) U3.6 ; v1(14.645,9.998) 14.759,9.998 15.101,9.656 15.939,9.656 U1.5
  Bottom Layer w0.178: v1(7.194,16.764) 7.879,16.764 v1(14.645,9.998)
DTR: Q1.1 R6.2 U1.28 | length 14.5
  Top Layer w0.178: v1(15.892,12.481) 16.787,12.481 16.843,12.537 U1.28 ; v1(22.636,4.963) R6.2 Q1.1
  Bottom Layer w0.178: v1(15.892,12.481) 15.905,12.469 15.905,10.971 21.912,4.963 v1(22.636,4.963)
EN: C5.1 Q1.3 R1.2 U2.9 | length 25.9
  Top Layer w0.254: v1(21.874,10.312) 21.874,1.575 22.356,1.092 23.398,1.092 23.677,1.372 23.677,2.225 Q1.3 ; v1(23.302,15.9) 23.353,15.951 26.237,15.951 ; U2.9@26.245,14.046 26.245,14.325 26.237,14.333 26.237,15.951 ; C5.1 27.929,16.669 27.821,16.561 R1.2 27.77,15.951 26.237,15.951
  Bottom Layer w0.254: v1(21.874,10.312) 22.356,10.795 22.356,14.954 v1(23.302,15.9)
GND: C1.1 C2.1 C3.1 C5.2 C6.2 C7.2 C9.2 C10.1 C11.1 C13.2 C15.2 C18.2 C24.2 C25.2 D4.1 FL1.3 H1.5 H1.6 J2.2 J4.2 J4.3 J6.2 J6.3 R4.2 R11.2 R16.1 U1.3 U1.29 U2.49 U3.2 U4.2 U5.2 U8.4 U8.5 U8.6 U10.1 U10.2 U10.3 U10.4 U10.7 U12.10 U12.12 U12.13 U12.24 | length 101.2
  Top Layer w0.093: 4.415,24.528 7.331,23.77 7.943,22.729 7.943,22.666 7.916,22.466 7.915,22.228 FL1.3
  Top Layer w0.178: 10.698,14.122 11.536,14.122 11.553,14.105 11.553,12.133 v1(12.462,11.224) 12.446,11.184 12.616,11.184 12.861,10.938 12.986,10.938 13.09,10.834 13.09,10.424 C3.1 ; 11.663,16.952 11.968,17.257 U12.12
  Top Layer w0.254: H1.6@1.74,16.45 1.74,15.055 1.716,15.031 1.716,14.823 1.508,14.823 1.188,14.503 0.917,14.232 0.917,7.091 v1(0.889,6.969) 1.74,7.82 1.74,8.95 1.74,11.45 3.713,11.45 3.763,11.4 H1.5@4.19,11.4 ; J4.2@1.74,19.422 1.376,19.787 1.376,22.372 J4.3 2.516,22.372 3.697,23.553 3.697,23.81 v1(3.763,23.876) 4.415,24.528 5.715,25.827 D4.1 ; H1.5 H1.5@4.19,11.4 ; R11.2 6.105,9.5 4.19,9.5 H1.5@4.19,11.4 ; U3.2 v1(9.031,17.414) ; C7.2 C7.2@8.412,13.818 ; U4.2 8.716,14.122 C7.2@8.412,13.818 ; 11.663,16.952 11.51,16.8 11.51,14.935 10.698,14.122 10.056,14.037 C7.2@8.412,13.818 ; C3.1 13.517,12.316 C9.2 ; v1(13.575,8.192) 13.575,8.098 13.69,7.983 13.69,7.854 C18.2 ; v1(13.786,1.067) U8.5 13.937,1.717 14.047,1.827 14.115,1.827 14.115,2.561 14.309,2.755 14.847,2.755 C13.2 16.032,3.178 16.543,2.667 U5.2 17.37,2.494 17.809,2.494 18.666,1.637 18.666,1.259 18.889,1.036 20.708,1.036 21.043,1.372 v1(21.137,1.372) R4.2 ; U1.3 17.843,10.66 U1.29 ; R16.1 20.759,6.401 21.043,6.685 v1(21.137,6.685) ; U12.24 v1(26.237,31.257) ; v1(28.992,17.341) 29.012,17.321 29.012,16.968 C1.1 ; C24.2 33.799,9.977 33.799,9.718 34.201,9.316 v1(35.625,9.316) 36.349,8.592 ; C6.2 36.349,8.592 ; v1(36.948,12.892) 36.948,13.807 J6.3 ; J6.2@37.084,17.257 37.084,17.78 v1(37.465,18.161) ; J2.2@39.838,6.961 J2.2 38.152,6.788 36.349,8.592 ; U10.3 U10.2 U10.1
  Bottom Layer w0.254: C15.2 21.394,28.067 v1(22.352,28.067) ; C10.1 21.759,28.859 21.759,28.66 v1(22.352,28.067) ; C11.1 22.354,29.52 v1@22.354,28.069 ; C25.2 22.418,28.286 22.418,28.133 v1@22.354,28.069 ; v1(22.352,28.067) v1@22.354,28.069
  other v1: 18.273,10.287 27.492,11.341 8.051,13.381 4.049,15.936 33.549,16.669 13.507,17.145 24.609,17.341 13.471,19.431
GPS_EN: Q5.1 U2.12 | length 25.9
  Top Layer w0.254: v1(23.96,14.823) 24.737,14.046 U2.12
  Bottom Layer w0.254: Q5.1 16.261,21.615 16.794,21.082 24.381,21.082 25.607,19.856 25.607,15.933 25.386,15.712 24.849,15.712 v1(23.96,14.823)
IO0: Q1.6 R7.2 U2.23 | length 7.3
  Top Layer w0.178: R7.2 25.437,4.26 26.138,3.559 Q1.6
  Top Layer w0.254: U2.23 23.96,7.908 23.462,7.908 23.169,7.614 23.169,5.772 23.617,5.323 R7.2
NetBAT1_2: BAT1.2 C19.2 J1.2 U8.2 U8.3 U8.7 | length 58.8
  Top Layer w0.178: C19.2 U8.3@11.815,1.067 ; U8.3 U8.3@11.815,1.067 ; U8.2 11.815,1.717 U8.3@11.815,1.067
  Top Layer w0.254: J1.2 4.316,3.371 5.07,4.125 5.653,4.125 v1(5.719,4.191) 11.355,4.191 11.988,3.558 11.988,3.333 12.672,2.649 12.672,1.856 U8.7
  Top Layer w0.305: U8.2 U8.7
  Bottom Layer w0.254: v1(5.719,4.191) 5.143,3.615 5.143,1.932 6.689,0.386 23.479,0.386 24.668,1.575 27.741,1.575 27.792,1.524 30.637,1.524 BAT1.2
NetC1_2: C1.2 L1.2 U2.2 | length 3
  Top Layer w0.093: U2.2 29.737,14.625 30.054,14.943 30.096,14.984 30.225,15.113 30.511,15.113 30.797,15.399 30.778,15.418 L1.2
  Top Layer w0.254: C1.2@30.054,14.943 C1.2
NetC2_2: C2.2 J6.1 L1.1 | length 3.3
  Top Layer w0.093: L1.1 32.34,15.341 C2.2 35.482,15.341 J6.1
NetC3_2: C3.2 R5.1 U1.6 | length 6.6
  Top Layer w0.178: C3.2 13.736,9.316 14.831,9.316 14.923,9.224 14.95,9.224 15.014,9.16 U1.6
  Top Layer w0.254: R5.1 11.934,6.527 11.786,6.675 11.736,6.675 11.521,6.89 11.521,7.1 11.956,7.536 12.671,7.536 12.894,7.76 12.894,8.474 C3.2
NetC7_1: C7.1 D1.1 Q2.2 SW1.1 U4.1 U4.3 | length 45.2
  Top Layer w0.178: D1.1 8.64,7.468 v1(9.148,7.976) ; 9.148,12.7 9.148,12.706 9.605,13.163 U4.3
  Top Layer w0.254: v1(5.192,6.477) 6.183,7.468 D1.1 ; C7.1 7.784,15.055 7.37,14.641 7.37,12.827 7.497,12.7 ; v1(9.148,7.976) 9.148,7.267 Q2.2 ; v1(9.148,11.049) 7.497,12.7 ; U4.3 10.063,13.163 10.063,12.827 9.936,12.7 9.148,12.7 7.497,12.7
  Top Layer w0.508: C7.1 8.42,15.063 U4.1
  Bottom Layer w0.254: SW1.1 1.941,16.89 0.208,15.157 0.208,6.687 0.607,6.288 4.853,6.288 v1@5.143,6.579 ; v1(9.148,7.976) v1(9.148,11.049)
NetC19_1: C19.1 R17.2 U8.1 | length 3.4
  Top Layer w0.178: R17.2 9.301,1.476 9.792,1.967 C19.1 10.717,2.367 U8.1
NetD2_1: D2.1 R14.1 | length 2.2
  Top Layer w0.178: D2.1 12.991,4.092 13.443,4.092 13.913,4.561 R14.1
NetD4_2: D4.2 R24.2 | length 2.2
  Top Layer w0.254: D4.2 7.004,28.978 7.025,28.999 R24.2
NetD6_1: D6.1 R10.1 | length 1.6
  Top Layer w0.178: R10.1 31.22,2.86 D6.1
NetFL1_1: FL1.1 R23.2 | length 2
  Top Layer w0.254: FL1.1 8.366,21.209 8.874,20.701 R23.2
NetFL1_2: FL1.2 L3.1 | length 1.2
  Top Layer w0.254: L3.1 FL1.2
NetJ4_1: J4.1 L3.2 U12.11 | length 11.8
  Top Layer w0.093: J4.1 5.437,20.897 ; L3.2 5.143,21.19 5.437,20.897 ; U12.11 9.537,18.357 6.997,20.897 5.437,20.897
NetQ1_2: Q1.2 R3.1 | length 2.7
  Top Layer w0.178: Q1.2 24.82,2.875 25.138,2.557 R3.1
NetQ1_5: Q1.5 R6.1 | length 6.9
  Top Layer w0.178: v1(22.636,1.778) R6.1 ; Q1.5 v1(27.237,2.875)
  Bottom Layer w0.178: v1(22.636,1.778) 23.733,2.875 v1(27.237,2.875)
NetR2_1: R2.1 R16.2 U1.8 | length 4.9
  Top Layer w0.178: R2.1 R16.2
  Top Layer w0.254: U1.8 16.843,6.428 17.861,5.41 R2.1
NetR4_1: R4.1 U5.5 | length 1.5
  Top Layer w0.178: U5.5 R4.1
NetR5_2: R5.2 U1.9 | length 6.3
  Top Layer w0.178: R5.2 R5.2@12.934,6.685 ; U1.9 17.343,6.969 v1(17.733,6.579)
  Top Layer w0.254: R5.2 13.006,6.404 13.814,6.404 v1(13.88,6.338)
  Bottom Layer w0.178: v1@14.036,6.579 v1(17.733,6.579)
NetR14_2: R14.2 U5.1 | length 2.2
  Top Layer w0.254: R14.2 16.253,4.561 16.573,4.241 16.573,3.617 U5.1
NetR23_1: R23.1 U12.9 | length 2.7
  Top Layer w0.254: R23.1 12.669,20.701 12.813,20.557 U12.9
NetR24_1: R24.1 U12.3 | length 2.9
  Top Layer w0.254: R24.1 10.21,29.057 U12.3
NetR30_2: R30.2 U12.8 | length 2.3
  Top Layer w0.178: R30.2 11.815,21.717 11.875,21.657 U12.8
RED: R10.2 U2.35 | length 2.8
  Top Layer w0.178: R10.2 U2.35
RTS: Q1.4 R3.2 U1.24 | length 31.5
  Top Layer w0.178: U1.24 18.843,15.209 19.281,15.646 v1(19.343,15.646) ; R3.2 Q1.4 v1(28.02,2.225)
  Bottom Layer w0.178: v1(19.343,15.646) 16.514,15.646 15.249,14.382 15.249,12.215 15.473,11.991 15.473,10.312 22.229,3.556 27.716,3.556 28.02,3.251 v1(28.02,2.225)
RXD: U1.26 U2.40 | length 23.4
  Top Layer w0.254: v1(16.573,14.097) 16.64,14.031 16.969,14.031 17.818,13.182 17.818,12.56 U1.26 ; U2.40@31.346,8.91 31.852,8.91 v1@32.326,8.436
  Bottom Layer w0.254: v1(16.573,14.097) 16.573,10.967 19.104,8.436 v1@32.326,8.436
  other v1: 32.267,8.394
RXD1_GPS: U2.16 U12.20 | length 17.9
  Top Layer w0.254: U2.16@23.626,11.418 23.53,11.418 23.518,11.43 23.02,11.43 22.622,11.829 22.622,25.8 23.679,26.857 U12.20
SCL: U10.6 U12.19 | length 9.8
  Top Layer w0.254: U12.19 33.976,25.757 U10.6
SDA: U10.5 U12.18 | length 9.9
  Top Layer w0.254: U12.18 33.716,24.657 U10.5
Sub_IRQ: J2.1 R27.2 U2.14 | length 22.2
  Top Layer w0.254: v1(23.368,13.843) 23.368,13.749 23.169,13.55 23.169,12.706 23.462,12.412 23.96,12.412 U2.14 ; v1(37.128,10.383) 37.128,9.648 37.857,8.918 R27.2 ; R27.2@38.227,8.91 38.889,8.91 J2.1
  Bottom Layer w0.254: v1(23.368,13.843) 26.828,10.383 32.875,10.383 33.342,10.849 34.772,10.849 35.274,10.347 v1@37.164,10.347
TXD: U1.25 U2.41 | length 22.3
  Top Layer w0.254: v1(17.77,14.539) 18.343,13.966 U1.25@18.343,12.827 ; U2.41@31.409,9.418 31.852,9.418 32.019,9.586 v1@32.621,9.586
  Bottom Layer w0.254: v1(17.77,14.539) 19.027,13.282 19.027,10.194 19.811,9.41 26.081,9.41 26.323,9.652 32.687,9.652 v1@32.621,9.586
  other v1: 32.586,9.699
TXD1_GPS: U2.17 U12.21 | length 20.7
  Top Layer w0.254: U2.17 22.536,10.91 22.051,11.395 22.051,26.478 23.53,27.957 U12.21
VBAT: BAT1.1 C13.1 J1.1 Q2.3 R17.1 U5.3 | length 50.8
  Top Layer w0.178: C13.1 16.946,1.778 16.946,1.717 U5.3
  Top Layer w0.254: J1.1 6.751,2.371 7.336,2.956 10.395,2.956 v1(10.81,3.371) ; v1(8.009,1.717) 8.009,1.016 R17.1 ; v1(11.736,9.699) 11.736,9.605 11.934,9.407 11.934,8.222 Q2.3 ; U5.3 17.447,1.717 17.98,1.184 v1(17.989,1.184)
  Bottom Layer w0.254: v1(8.009,1.717) 13.071,1.717 ; v1(10.81,3.371) 10.904,3.371 11.328,2.947 11.701,2.947 12.112,2.535 12.252,2.535 13.071,1.717 ; v1(11.736,9.699) 10.41,11.025 10.41,11.44 9.15,12.7 BAT1.1 8.132,8.28 8.132,7.823 14.169,1.787 14.239,1.717 ; v1(17.989,1.184) 17.989,1.277 17.708,1.559 17.708,1.717 14.239,1.717 ; 13.071,1.717 13.473,1.717 13.504,1.748 14.068,1.748 14.099,1.717 14.239,1.717
VGPS: C10.2 C11.2 C15.1 C25.1 Q5.2 R30.1 U10.8 U12.22 U12.23 | length 46.6
  Top Layer w0.254: R30.1 14.111,22.717 21.551,30.157 U12.23 U12.22 32.196,29.057 U10.8
  Bottom Layer w0.254: Q5.2 18.611,30.422 C15.1 C10.2 C11.2 C25.1 25.363,32.131 33.862,32.131 U10.8
VUSB: C18.1 D1.2 D2.2 H1.1 Q2.1 R2.2 R11.1 U1.7 U3.5 U5.4 | length 50
  Top Layer w0.178: Q2.1 10.81,9.167 10.931,9.047 10.931,6.06 11.784,5.207 D2.2 ; C18.1 15.538,7.671 15.943,8.075 U1.7
  Top Layer w0.254: H1.1 3.708,14 3.103,14.605 3.103,17.145 3.469,17.511 v1(4.415,17.511) 4.464,17.463 6.103,17.463 U3.5 ; D2.2 14,5.207 14.773,5.98 14.773,6.477 ; v1(14.609,8.66) U1.7 ; C18.1 14.773,6.477 ; U5.4 19.347,1.717 18.689,2.375 18.675,2.375 18.191,2.859 18.191,4.362 18.031,4.521 ; R2.2 19.981,4.953 19.727,4.699 18.209,4.699 18.031,4.521 ; 14.773,6.477 15.636,5.613 16.939,5.613 18.031,4.521
  Top Layer w0.305: R11.1 D1.2 7.756,9.652 8.241,9.167 Q2.1
  Bottom Layer w0.254: v1(4.415,17.511) 5.345,16.581 5.719,16.581 6.679,15.621 7.046,15.621 12.078,10.589 12.216,10.589 12.262,10.543 12.726,10.543 v1(14.609,8.66)
pads on no net: H1.4 J1. J2. SW1.2 SW1.3 U1.1 U1.2 U1.10 U1.11 U1.12 U1.13 U1.14 U1.15 U1.16 U1.17 U1.18 U1.19 U1.20 U1.21 U1.22 U1.23 U1.27 U2.5 U2.6 U2.7 U2.8 U2.10 U2.11 U2.13 U2.15 U2.18 U2.20 U2.21 U2.22 U2.24 U2.25 U2.26 U2.27 U2.28 U2.29 U2.30 U2.31 U2.32 U2.33 U2.34 U2.36 U2.38 U2.39 U2.42 U2.44 U2.45 U2.47 U2.48 U3.3 U3.4 U4.4 U12.1 U12.2 U12.4 U12.5 U12.6 U12.7 U12.14 U12.15 U12.16 U12.17

## Polygon pours and split planes (outlines as drawn)
GND on Layer 1 (GND) (split plane): 41.524,26.467 44.829,26.467 44.829,0.51 0.51,0.51 0.51,32.384 41.533,32.499
+3.3V on Layer 2 (PWR) (split plane): 44.829,0.51 0.51,0.51 0.51,32.384 44.829,32.508

## Other copper
Top Layer:
  text "1" at 3.627,5.92 h1.02
Bottom Layer:
  text "4" at 4.464,7.671 h1.02
Layer 1 (GND) (plane layer: these items are gaps in the copper):
  pour cut-out: 41.524,26.467 41.533,32.817 cw(c41.597,32.786) 41.597,32.715 44.899,32.715 44.899,26.467
  lines w0.254: 45.216,8.001 45.216,17.399
  text "2" at 3.492,5.92 h1.02
Layer 2 (PWR) (plane layer: these items are gaps in the copper):
  lines w0.254: 45.242,8.001 45.242,17.399
  text "3" at 3.484,5.873 h1.02

## Silkscreen, mask and mechanical layers (free items; w line width, h text height)
Top Overlay:
  lines w0.127: 20.64,16.256 24.958,16.256
  text "SubMod" at 1.524,30.226 h1.25
Bottom Overlay:
  drawing of 1057 lines, arcs and shapes, not listed
  text "+3.3v" at 39.654,17.933 h0.89
  text "GND" at 36.915,1.178 h0.89
Mechanical 1:
  lines w0.254: 0,0.127 45.242,0.127 45.242,16.51 45.242,33.02 40.068,33.02 35.303,33.02 32.766,33.02 31.877,33.02 31.133,33.02 26.225,33.02 25.4,33.02 24.416,33.02 17.828,33.02 15.998,33.02 13.063,33.02 0.03,33.02 0.03,32.284 0.03,16.51 0.03,0.127

## Text inside footprints (layer, text, board x,y; h text height)
BAT1: Bottom Overlay "+" at 2.773,8.153 h1.52 r180; Bottom Overlay "+" at 14.381,13.335 h1.52 r180